# Altium PCB PCB.PcbDoc (part 1 of 2)
Units mm, origin at the board's own origin, x right, y up, seen from the top; angles counter-clockwise.
Board outline 100 x 50 mm, 4 copper layers (Top Layer, Vdd, GND, Bottom Layer), stack 0.603 mm thick; 99 components, 96 nets, 382 pads, 148 vias.
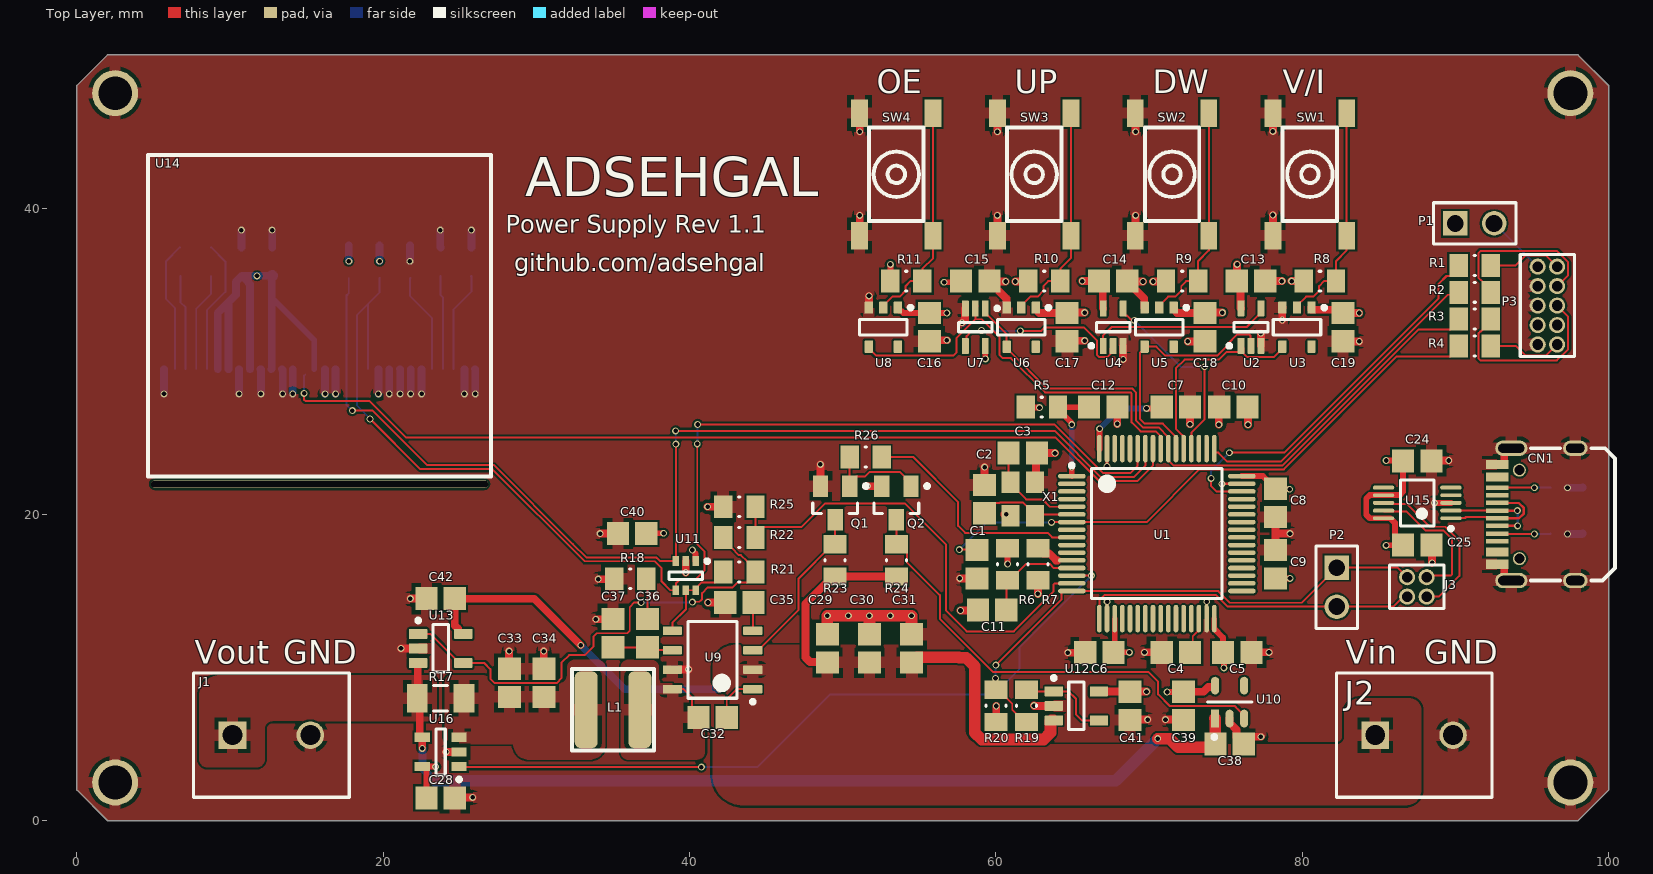
[diagram p0: Top Layer view]
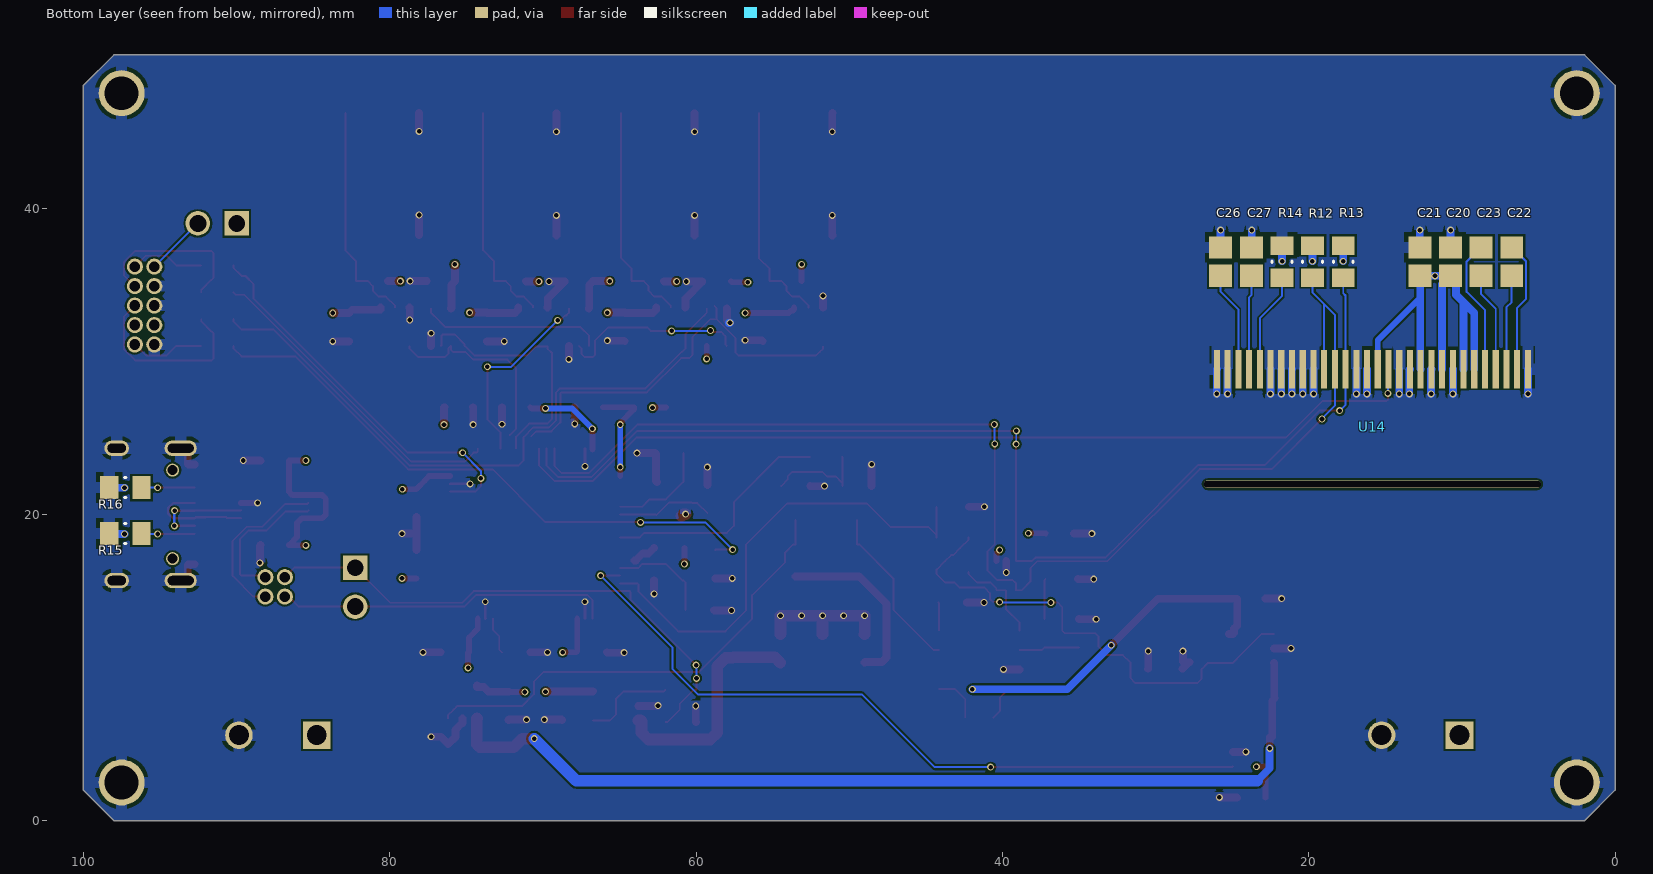
[diagram p1: Bottom Layer view, seen from below]
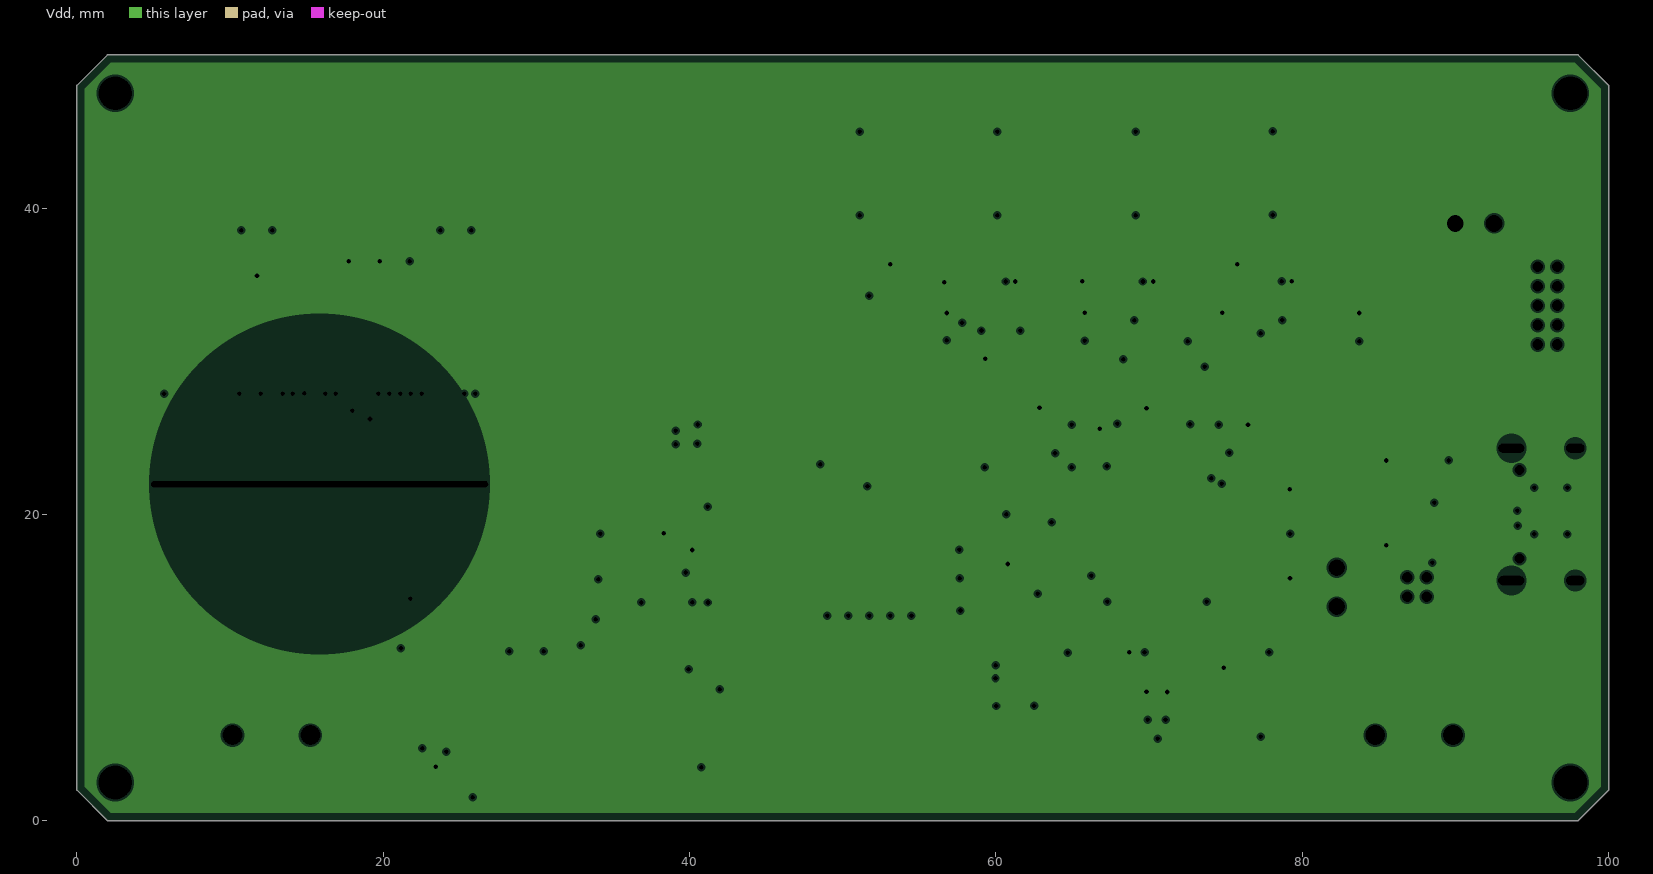
[diagram p2: Vdd, clearances drawn from the general rule]
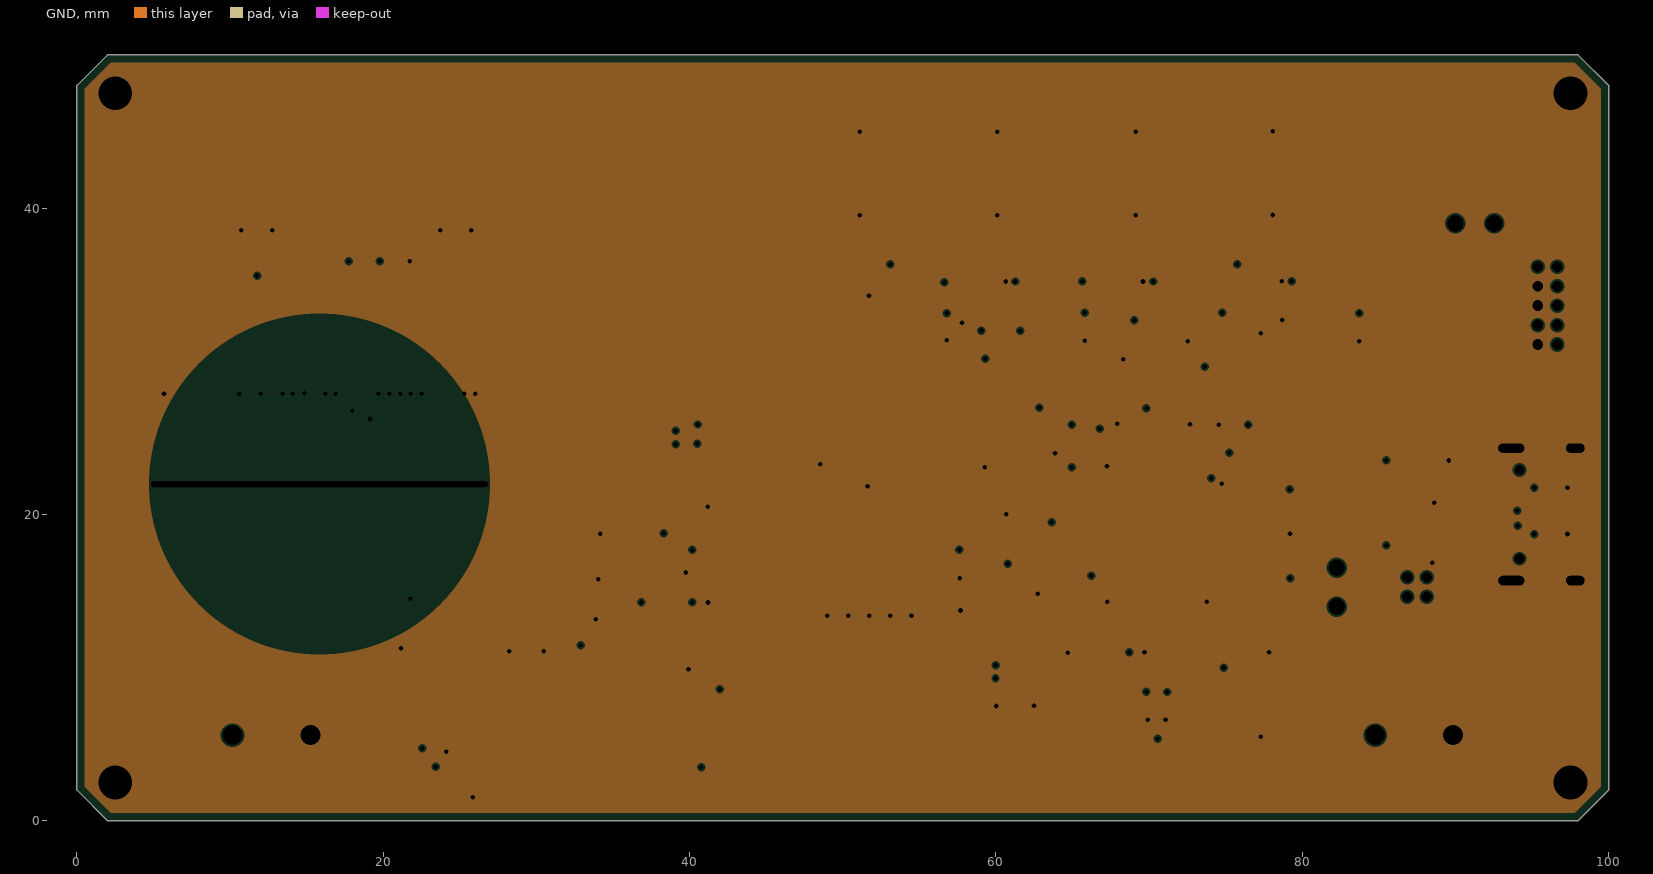
[diagram p3: GND, clearances drawn from the general rule]
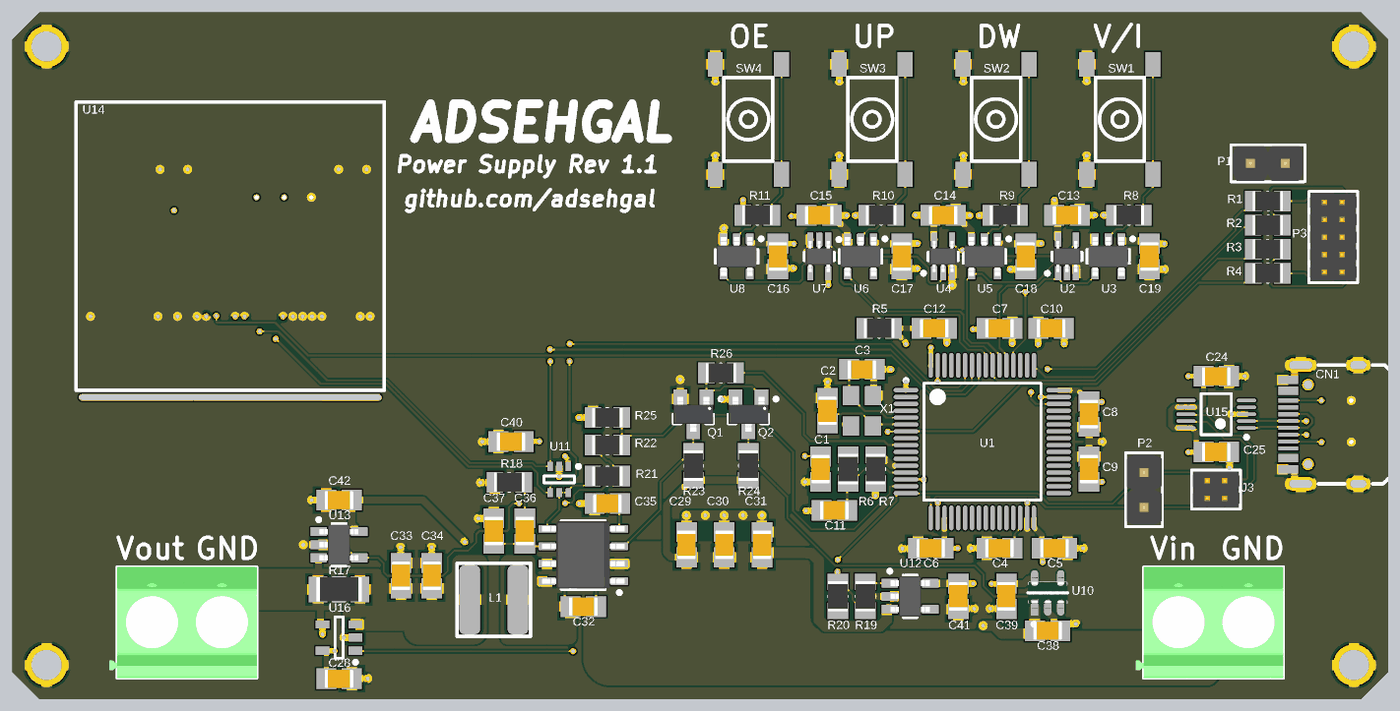
[diagram p4: 3D render of the assembled board from above, using the file's embedded part models]
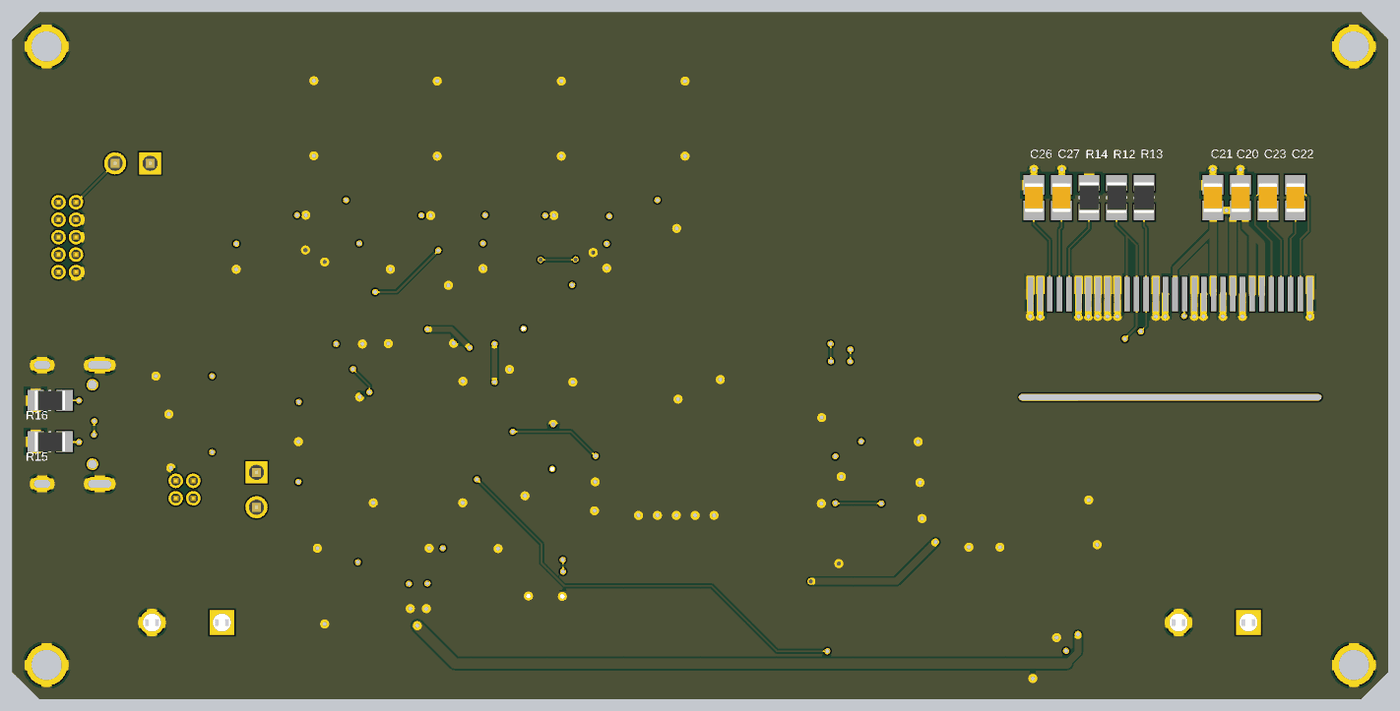
[diagram p5: 3D render of the assembled board from below, using the file's embedded part models]

## Layer stack, top to bottom
Top Solder: solder mask 0.0102, Solder Resist, Dk 3.5
Top Layer: signal copper 0.0356
Dielectric 2: prepreg 0.0711, PP-006, Dk 4.1
Vdd: plane copper 0.035, net +3v3
Dielectric 1: dielectric 0.32, FR-4, Dk 4.8
GND: plane copper 0.035, net GND
Dielectric 3: prepreg 0.0711, PP-006, Dk 4.1
Bottom Layer: signal copper 0.0356
Bottom Solder: solder mask 0.0102, Solder Resist, Dk 3.5

## Board outline
100,2 98,0 2,0 0,2 0,48 2,50 98,50 100,48

## Design rules (kind name [scope] priority, off if disabled: settings)
Clearance [All] p1: gap=0.127 ignorepadtopadclearanceinfootprint=FALSE except(0: Arc-Hole Track-Hole SMDPad-Hole THPad-Hole Via-Hole Fill-Hole Poly-Hole Region-Hole Text-Hole)
DiffPairsRouting [All] p1: maxlimit=0.254 minlimit=0.178 mostfreqgap=0.178 toplayer_minwidth=0.127 toplayer_maxwidth=0.381 toplayer_prefwidth=0.152 bottomlayer_minwidth=0.127 bottomlayer_maxwidth=0.381 bottomlayer_prefwidth=0.152 maxuncoupledlength=12.7
PlaneClearance [All] p1: clearance=0.127
PlaneConnect [All] p1: planeconnectstyle=Relief reliefexpansion=0.254 reliefentries=4 reliefconductorwidth=0.254 reliefairgap=0.254
PolygonConnect [All] p1: connectstyle=Relief reliefconductorwidth=0.762 reliefentries=4 polygonreliefangle="90 Angle" airgapwidth=0.254
RoutingVias [All] p1: holewidth=0.3 width=0.45 viastyle="Through Hole" minholewidth=0.3 minwidth=0.45 maxholewidth=0.3 maxwidth=0.45
SolderMaskExpansion [All] p1: expansion=0.102 istentingtop=FALSE
Width Power_3v3 [(InNet('+3v3') OR InNet('Vbat'))] p1: maxlimit=0.762 minlimit=0.178 preferedwidth=0.508
Width Power_AGND [InNet('AGND')] p2: maxlimit=0.762 minlimit=0.381 preferedwidth=0.508
Width Power_DGND [InNet('GND')] p3: maxlimit=0.762 minlimit=0.178 preferedwidth=0.508
Width Power_Vout [InNet('VCC')] p4: maxlimit=0.762 minlimit=0.381 preferedwidth=0.508
Width Power_Vin [InNet('+12')] p5: maxlimit=0.762 minlimit=0.381 preferedwidth=0.508
Width Width_5mil [All] p6: maxlimit=0.152 minlimit=0.127 preferedwidth=0.127
Width Width_0.254mm [All] p7 off: maxlimit=0.254 minlimit=0.254 preferedwidth=0.254
27 further rules are at their usual default settings.

## Classes and differential pairs
net class N000-3_[0..15]: N000-3_0 N000-3_1 N000-3_2 N000-3_3 N000-3_4 N000-3_5 N000-3_6 N000-3_7 N000-3_8 N000-3_9 N000-3_10 N000-3_11 N000-3_12 N000-3_13 N000-3_14 N000-3_15
net class N000-2_[0..15]: N000-2_0 N000-2_1 N000-2_2 N000-2_3 N000-2_4 N000-2_5 N000-2_6 N000-2_7 N000-2_8 N000-2_9 N000-2_10 N000-2_11 N000-2_12 N000-2_13 N000-2_14 N000-2_15
net class N000-1_[0..15]: N000-1_0 N000-1_1 N000-1_2 N000-1_3 N000-1_4 N000-1_5 N000-1_6 N000-1_7 N000-1_8 N000-1_9 N000-1_10 N000-1_11 N000-1_12 N000-1_13 N000-1_14 N000-1_15
component class UI: C13 C14 C15 C16 C17 C18 C19 C20 C21 C22 C23 C24 C25 C26 C27 CN1 J3 R8 R9 R10 R11 R12 R13 R14 R15 R16 SW1 SW2 SW3 SW4 U2 U3 U4 U5 U6 U7 U8 U15
component class Power: C28 C29 C30 C31 C32 C33 C34 C35 C36 C37 C38 C39 C40 C41 C42 J1 J2 L1 Q1 Q2 R17 R18 R19 R20 R21 R22 R23 R24 R25 R26 U9 U10 U11 U12 U13 U16
component class MCU: C1 C2 C3 C4 C5 C6 C7 C8 C9 C10 C11 C12 P1 P2 P3 R1 R2 R3 R4 R5 R6 R7 U1 X1
differential pair D: +D_P -D_N

## Components (designator, comment, footprint, x,y, rotation, side; value= is the part's Value field where it differs from the comment)
C1 "Capacitor 100 nF +/-10% 50 V 0805" CAPC2013X95X50ML10T25 58.75,16.75 r270 top value=100nF
C2 "Capacitor 100 nF +/-10% 50 V 0805" CAPC2013X95X50ML10T25 59.25,21 r270 top value=100nF
C3 "Capacitor 100 nF +/-10% 50 V 0805" CAPC2013X95X50ML10T25 61.75,24 r180 top value=100nF
C4 "Capacitor 100 nF +/-10% 50 V 0805" CAPC2013X95X50ML10T25 71.75,11 r180 top value=100nF
C5 "Capacitor 100 nF +/-10% 50 V 0805" CAPC2013X95X50ML10T25 75.75,11 r180 top value=100nF
C6 "Capacitor 100 nF +/-10% 50 V 0805" CAPC2013X95X50ML10T25 66.75,11 r0 top value=100nF
C7 "Capacitor 100 nF +/-10% 50 V 0805" CAPC2013X95X50ML10T25 71.75,27 r180 top value=100nF
C8 "Capacitor 100 nF +/-10% 50 V 0805" CAPC2013X95X50ML10T25 78.25,20.75 r90 top value=100nF
C9 "Capacitor 100 nF +/-10% 50 V 0805" CAPC2013X95X50ML10T25 78.25,16.75 r270 top value=100nF
C10 "Capacitor 100 nF +/-10% 50 V 0805" CAPC2013X95X50ML10T25 75.5,27 r0 top value=100nF
C11 "Capacitor 100 nF +/-10% 50 V 0805" CAPC2013X95X50ML10T25 59.75,13.75 r0 top value=100nF
C12 "Capacitor 100 nF +/-10% 50 V 0805" CAPC2013X95X50ML10T25 67,27 r180 top value=100nF
C13 "Capacitor 100 nF +/-10% 50 V 0805" CAPC2013X95X50ML10T25 76.65,35.225 r0 top value=100nF
C14 "Capacitor 100 nF +/-10% 50 V 0805" CAPC2013X95X50ML10T25 67.65,35.225 r0 top value=100nF
C15 "Capacitor 100 nF +/-10% 50 V 0805" CAPC2013X95X50ML10T25 58.65,35.225 r0 top value=100nF
C16 "Capacitor 100 nF +/-10% 50 V 0805" CAPC2013X95X50ML10T25 55.65,32.225 r270 top value=100nF
C17 "Capacitor 100 nF +/-10% 50 V 0805" CAPC2013X95X50ML10T25 64.65,32.225 r270 top value=100nF
C18 "Capacitor 100 nF +/-10% 50 V 0805" CAPC2013X95X50ML10T25 73.65,32.225 r270 top value=100nF
C19 "Capacitor 100 nF +/-10% 50 V 0805" CAPC2013X95X50ML10T25 82.65,32.225 r270 top value=100nF
C20 "Capacitor 100 nF +/-10% 50 V 0805" CAPC2013X95X50ML10T25 10.75,36.5 r90 bottom value=1uF
C21 "Capacitor 100 nF +/-10% 50 V 0805" CAPC2013X95X50ML10T25 12.75,36.5 r270 bottom value=1uF
C22 "Capacitor 100 nF +/-10% 50 V 0805" CAPC2013X95X50ML10T25 6.75,36.5 r270 bottom value=1uF
C23 "Capacitor 100 nF +/-10% 50 V 0805" CAPC2013X95X50ML10T25 8.75,36.5 r90 bottom value=1uF
C24 "Capacitor 100 nF +/-10% 50 V 0805" CAPC2013X95X50ML10T25 87.5,23.5 r0 top value=100nF
C25 "Capacitor 100 nF +/-10% 50 V 0805" CAPC2013X95X50ML10T25 87.5,18 r0 top value=100nF
C26 "Capacitor 100 nF +/-10% 50 V 0805" CAPC2013X95X50ML10T25 25.75,36.5 r270 bottom value=2.2uF
C27 "Capacitor 100 nF +/-10% 50 V 0805" CAPC2013X95X50ML10T25 23.75,36.5 r270 bottom value=4.7uF
C28 "Capacitor 100 nF +/-10% 50 V 0805" CAPC2013X95X50ML10T25 23.75,1.5 r0 top value=100nF
C29 "Capacitor 100 nF +/-10% 50 V 0805" CAPC2013X95X50ML10T25 49,11.25 r90 top value=100nF
C30 "Capacitor 100 nF +/-10% 50 V 0805" CAPC2013X95X50ML10T25 51.75,11.25 r90 top value=100nF
C31 "Capacitor 100 nF +/-10% 50 V 0805" CAPC2013X95X50ML10T25 54.5,11.25 r90 top value=100nF
C32 "Capacitor 100 nF +/-10% 50 V 0805" CAPC2013X95X50ML10T25 41.5,6.75 r180 top value=100nF
C33 "Capacitor 100 nF +/-10% 50 V 0805" CAPC2013X95X50ML10T25 28.25,9 r270 top value=100nF
C34 "Capacitor 100 nF +/-10% 50 V 0805" CAPC2013X95X50ML10T25 30.5,9 r270 top value=100nF
C35 "Capacitor 100 nF +/-10% 50 V 0805" CAPC2013X95X50ML10T25 43.25,14.25 r180 top value=100nF
C36 "Capacitor 100 nF +/-10% 50 V 0805" CAPC2013X95X50ML10T25 37.25,12.25 r90 top value=100nF
C37 "Capacitor 100 nF +/-10% 50 V 0805" CAPC2013X95X50ML10T25 35,12.25 r90 top value=100nF
C38 "Capacitor 100 nF +/-10% 50 V 0805" CAPC2013X95X50ML10T25 75.25,5 r180 top value=100nF
C39 "Capacitor 100 nF +/-10% 50 V 0805" CAPC2013X95X50ML10T25 72.25,7.5 r90 top value=100nF
C40 "Capacitor 100 nF +/-10% 50 V 0805" CAPC2013X95X50ML10T25 36.25,18.75 r180 top value=100nF
C41 "Capacitor 100 nF +/-10% 50 V 0805" CAPC2013X95X50ML10T25 68.75,7.5 r270 top value=100nF
C42 "Capacitor 100 nF +/-10% 50 V 0805" CAPC2013X95X50ML10T25 23.75,14.5 r180 top value=100nF
CN1 "USB C 16 Pin SMD" "USB C 16 Pin SMD-Footprint-1" 92,20 r90 top locked
J1 "1729128" PHOE-1729128-2_V 12.7,5.588 r0 top locked
J2 "1729128" PHOE-1729128-2_V 87.3,5.588 r0 top locked
J3 "62200421121" 62200421121 87.478,15.265 r270 top
L1 "LQH5BPN4R7NT0L" LQH5BPN4R7NT0L-Footprint-1 35,7.25 r180 top
P1 "61300211121" 61300211121 91.25,39 r0 top
P2 "61300211121" 61300211121 82.25,15.25 r270 top
P3 "62201021121" 62201021121 96,33.631 r270 top
Q1 "FDN335N" FAIR-SSOT3L-3_V 49.5,20.75 r270 top
Q2 "FDN335N" FAIR-SSOT3L-3_V 53.5,20.75 r270 top
R1 "Resistor 0R +/- 1% 0805 125 mW" RESC2013X50X35ML15T15 91.25,36.25 r180 top value=0
R2 "Resistor 0R +/- 1% 0805 125 mW" RESC2013X50X35ML15T15 91.25,34.5 r180 top value=0
R3 "Resistor 0R +/- 1% 0805 125 mW" RESC2013X50X35ML15T15 91.25,32.75 r180 top value=0
R4 "Resistor 0R +/- 1% 0805 125 mW" RESC2013X50X35ML15T15 91.25,31 r180 top value=0
R5 "Resistor 0R +/- 1% 0805 125 mW" RESC2013X50X35ML15T15 63,27 r0 top value=0
R6 "Resistor 0R +/- 1% 0805 125 mW" RESC2013X50X35ML15T15 60.75,16.75 r270 top value=0
R7 "Resistor 0R +/- 1% 0805 125 mW" RESC2013X50X35ML15T15 62.75,16.75 r270 top value=0
R8 "Resistor 0R +/- 1% 0805 125 mW" RESC2013X50X35ML15T15 81.15,35.225 r180 top value=1K
R9 "Resistor 0R +/- 1% 0805 125 mW" RESC2013X50X35ML15T15 72.15,35.225 r180 top value=1K
R10 "Resistor 0R +/- 1% 0805 125 mW" RESC2013X50X35ML15T15 63.15,35.225 r180 top value=1K
R11 "Resistor 0R +/- 1% 0805 125 mW" RESC2013X50X35ML15T15 54.15,35.225 r180 top value=1K
R12 "Resistor 0R +/- 1% 0805 125 mW" RESC2013X50X35ML15T15 19.75,36.5 r90 bottom value=4.7K
R13 "Resistor 0R +/- 1% 0805 125 mW" RESC2013X50X35ML15T15 17.75,36.5 r90 bottom value=4.7K
R14 "Resistor 0R +/- 1% 0805 125 mW" RESC2013X50X35ML15T15 21.75,36.5 r90 bottom value=390K
R15 "Resistor 0R +/- 1% 0805 125 mW" RESC2013X50X35ML15T15 97.25,18.75 r0 bottom value=5.1K
R16 "Resistor 0R +/- 1% 0805 125 mW" RESC2013X50X35ML15T15 97.25,21.75 r0 bottom value=5.1K
R17 "Resistor 0R +/- 5% 1206 250 mW" RESC3216X60X45ML15T20 23.75,8 r0 top value=0
R18 "Resistor 0R +/- 1% 0805 125 mW" RESC2013X50X35ML15T15 36.125,15.8 r180 top value=0
R19 "Resistor 0R +/- 1% 0805 125 mW" RESC2013X50X35ML15T15 62,7.5 r270 top value=0
R20 "Resistor 0R +/- 1% 0805 125 mW" RESC2013X50X35ML15T15 60,7.5 r90 top value=0
R21 "Resistor 0R +/- 1% 0805 125 mW" RESC2013X50X35ML15T15 43.25,16.25 r180 top value=0
R22 "Resistor 0R +/- 1% 0805 125 mW" RESC2013X50X35ML15T15 43.25,18.5 r0 top value=0
R23 "Resistor 0R +/- 1% 0805 125 mW" RESC2013X50X35ML15T15 49.5,17 r270 top value=0
R24 "Resistor 0R +/- 1% 0805 125 mW" RESC2013X50X35ML15T15 53.5,17 r270 top value=0
R25 "Resistor 0R +/- 1% 0805 125 mW" RESC2013X50X35ML15T15 43.25,20.5 r0 top value=0
R26 "Resistor 0R +/- 1% 0805 125 mW" RESC2013X50X35ML15T15 51.5,23.75 r180 top value=0
SW1 "K2-1187SQ-A4SW" K2-1187SQ-A4SW-Footprint-1 80.495,42.201 r90 top
SW2 "K2-1187SQ-A4SW" K2-1187SQ-A4SW-Footprint-1 71.495,42.201 r90 top
SW3 "K2-1187SQ-A4SW" K2-1187SQ-A4SW-Footprint-1 62.495,42.201 r90 top
SW4 "K2-1187SQ-A4SW" K2-1187SQ-A4SW-Footprint-1 53.495,42.201 r90 top
U1 "STM32F401RBT6" STM-LQFP64_N 70.5,18.75 r0 top locked
U2 "SN74LVC1G08DCKR" DCK0005A_M 76.65,32.225 r90 top
U3 "SN74LVC1G17DBVR" DBV0005A_L 79.65,32.225 r270 top
U4 "SN74LVC1G08DCKR" DCK0005A_M 67.65,32.225 r90 top
U5 "SN74LVC1G17DBVR" DBV0005A_L 70.65,32.225 r270 top
U6 "SN74LVC1G17DBVR" DBV0005A_L 61.65,32.225 r270 top
U7 "SN74LVC1G08DCKR" DCK0005A_M 58.65,32.225 r270 top
U8 "SN74LVC1G17DBVR" DBV0005A_L 52.65,32.225 r270 top
U9 "TPS54331DR" D0008A_L 41.5,10.5 r180 top
U10 "MIC5205-3.3YM5-TR" FP-M5-IPC_C 75.25,7.75 r90 top
U11 "MCP4018T-502E/LT" SC70-LT6_L 39.75,16 r270 top
U12 "TLV2711CDBVR" DBV0005A_M 65.25,7.5 r0 top
U13 "TLV2711CDBVR" DBV0005A_M 23.75,11.25 r0 top
U14 "SSD1306_0.96in" SSD1306_0.96in-Footprint-1 15.845,32.976 r0 top locked
U15 "CH340E" TSSOP50P490X110-10N 87.5,20.75 r180 top
U16 "INA180A3" SOT95P245X110-5N 23.75,4.5 r180 top
X1 "Crystal_3225_1_3" Crystal_3225_1_3-Footprint-1 61.75,21 r270 top

## Footprints (in the part's own frame and the unit in brackets; to place one, negate y for a bottom-side part, rotate by r counter-clockwise, add the part's x,y. Pads: shape width x height; smd on the part's side, far side on the other; paste and mask are expansions set on the pad)
61300211121 [mm] "Pin Header, pitch 2.54 mm, THT, Vertical, single row, 2p"
  rect 1.6x1.6 hole 1.1: 1(-1.27,0)
  round 1.6 hole 1.1: 2(1.27,0)
  silkscreen extent -2.69,-1.35 2.69,1.35, body extent -2.54,-1.27 2.54,1.27, height 8.57
62200421121 [mm] "Pin Header, pitch 1.27 mm, THT, Vertical, dual row, 4p"
  round 1.05 hole 0.7: 1(-0.635,-0.635) 2(-0.635,0.635) 3(0.635,-0.635) 4(0.635,0.635)
  silkscreen extent -1.42,-1.78 1.42,1.78, body extent -1.27,-1.7 1.27,1.7, height 5.33
62201021121 [mm] "Pin Header, pitch 1.27 mm, THT, Vertical, dual row, 10p"
  round 1.05 hole 0.7: 1(-2.54,-0.635) 2(-2.54,0.635) 3(-1.27,-0.635) 4(-1.27,0.635) 5(0,-0.635) 6(0,0.635) 7(1.27,-0.635) 8(1.27,0.635) 9(2.54,-0.635) 10(2.54,0.635)
  silkscreen extent -3.32,-1.78 3.32,1.78, body extent -3.17,-1.7 3.18,1.7, height 5.33
CAPC2013X95X50ML10T25 [mm] "Chip Capacitor, 2-Leads, Body 2.10x1.35mm, IPC Low Density"
  rect 1.45x1.5 smd: 1(-0.925,0) 2(0.925,0)
  body extent -1.05,-0.67 1.05,0.67, height 0.95
Crystal_3225_1_3-Footprint-1 [mm]
  rect 1.4x1.2 smd: 1(-1.1,-0.8) 2(1.1,-0.8) 3(1.1,0.8) 4(-1.1,0.8)
  body extent -1.52,-1.27 1.52,1.27, height 0.7
D0008A_L [mm] "SOIC, 8-Leads, Body 5x4mm, Pitch 1.27mm, IPC High Density"
  rrect18% 1.25x0.55 smd: 1(-2.625,1.905) 2(-2.625,0.635) 3(-2.625,-0.635) 4(-2.625,-1.905) 5(2.625,-1.905) 6(2.625,-0.635) 7(2.625,0.635) 8(2.625,1.905)
  silkscreen extent -2.75,-2.5 1.6,2.85, body extent -3,-2.45 3,2.45, height 1.63
DBV0005A_L [mm] "SOT23, 5-Leads, Body 3.05x1.75mm, Pitch 0.95mm, IPC High Density"
  rrect18% 0.8x0.55 smd: 1(-1.275,0.95) 2(-1.275,0) 3(-1.275,-0.95) 4(1.275,-0.95) 5(1.275,0.95)
  silkscreen extent -1.4,-1.55 0.5,1.9, body extent -1.42,-1.46 1.42,1.46, height 1.08
DBV0005A_M [mm] "SOT23, 5-Leads, Body 3.05x1.75mm, Pitch 0.95mm, IPC Low Density"
  rrect15% 1.2x0.65 smd: 1(-1.475,0.95) 2(-1.475,0) 3(-1.475,-0.95) 4(1.475,-0.95) 5(1.475,0.95)
  silkscreen extent -1.6,-1.55 0.5,1.95, body extent -1.42,-1.46 1.42,1.46, height 1.08
DCK0005A_M [mm] "SOT23, 5-Leads, Body 2.15x1.4mm, Pitch 0.65mm, IPC Low Density"
  rrect22% 1.05x0.45 smd: 1(-1.225,0.65) 2(-1.225,0) 3(-1.225,-0.65) 4(1.225,-0.65) 5(1.225,0.65)
  silkscreen extent -1.35,-1.1 0.3,1.55, body extent -1.14,-1 1.14,1, height 0.94
FAIR-SSOT3L-3_V [mm] "SOT23, 3-Leads, Body 2.92x1.4mm, Pitch 0.95mm"
  rect 1.4x1 smd: 1(-1.1,0.95) 2(-1.1,-0.95) 3(1.1,0)
  silkscreen extent -1.22,-1.46 0.7,2.13, body extent -1.26,-1.46 1.26,1.46, height 1.12
FP-M5-IPC_C [mm]
  rect 1.156x0.53 smd paste+0 mask+0: 1(-1.075,0.95)
  rrect100% 1.156x0.53 smd paste+0 mask+0: 2(-1.075,0) 3(-1.075,-0.95) 4(1.075,-0.95) 5(1.075,0.95)
  silkscreen extent -2.4,-1.45 0,1.45, body extent -1.75,-1.55 1.75,1.55, height 0.25
K2-1187SQ-A4SW-Footprint-1 [mm]
  rect 1.8x1.1 smd: 1(-4,2.4) 2(-4,-2.4) 3(4,2.4) 4(4,-2.4)
  silkscreen extent -3.05,-1.78 3.05,1.78
LQH5BPN4R7NT0L-Footprint-1 [mm]
  rrect50% 1.5x5 smd: 1(-1.75,0) 2(1.75,0)
  silkscreen extent -2.67,-2.67 2.67,2.67, body extent -2.67,-2.67 2.67,2.67, height 2.2
PHOE-1729128-2_V [mm] "Receptacle, 2-Leads, Body 8.1x10.16mm, Pitch 5.08mm"
  rect 1.8x1.8 hole 1.3: 1(-2.54,0)
  round 1.8 hole 1.3: 2(2.54,0)
  silkscreen extent -5.08,-4.05 5.08,4.05, body extent -5.65,-4.05 5.08,4.05, height 10.01
RESC2013X50X35ML15T15 [mm] "Chip Resistor, 2-Leads, Body 2.2x1.4mm, IPC Low Density"
  rect 1.2x1.5 smd: 1(-1.05,0) 2(1.05,0)
  silkscreen extent -0.05,-0.65 0.05,0.65, body extent -1.1,-0.7 1.1,0.7, height 0.5
RESC3216X60X45ML15T20 [mm] "Chip Resistor, 2-Leads, Body 3.3x1.75mm, IPC Low Density"
  rect 1.35x1.85 smd: 1(-1.525,0) 2(1.525,0)
  silkscreen extent -0.45,-0.82 0.45,0.82, body extent -1.65,-0.87 1.65,0.87, height 0.6
SC70-LT6_L [mm] "SOT363, 6-Leads, Body 2x1.3mm, Pitch 0.65mm, Lead Span 2.1mm, IPC High Density"
  rect 0.65x0.4 smd: 1(-0.95,0.65) 2(-0.95,0) 3(-0.95,-0.65) 4(0.95,-0.65) 5(0.95,0) 6(0.95,0.65)
  silkscreen extent -1.07,-1.1 0.25,1.53, body extent -0.7,-1.1 0.7,1.1, height 1.1
SOT95P245X110-5N [mm] "SOT23, 5-Leads, Body 2.90x2.45mm, Pitch 0.95mm, IPC Medium Density"
  rect 1x0.6 smd: 1(-1.2,0.95) 2(-1.2,0) 3(-1.2,-0.95) 4(1.2,-0.95) 5(1.2,0.95)
  silkscreen extent -1.33,-1.5 0.3,1.92, body extent -0.7,-1.5 0.7,1.5, height 1.1
SSD1306_0.96in-Footprint-1 [mm]
  rect 0.4x2.5 smd far side: 1(-10.15,-3.5) 2(-9.45,-3.5) 3(-8.75,-3.5) 4(-8.05,-3.5) 5(-7.35,-3.5) 6(-6.65,-3.5) 7(-5.95,-3.5) 8(-5.25,-3.5) 9(-4.55,-3.5) 10(-3.85,-3.5) 11(-3.15,-3.5) 12(-2.45,-3.5) 13(-1.75,-3.5) 14(-1.05,-3.5) 15(-0.35,-3.5) 16(0.35,-3.5) 17(1.05,-3.5) 18(1.75,-3.5) 19(2.45,-3.5) 20(3.15,-3.5) 21(3.85,-3.5) 22(4.55,-3.5) 23(5.25,-3.5) 24(5.95,-3.5) 25(6.65,-3.5) 26(7.35,-3.5) 27(8.05,-3.5) 28(8.75,-3.5) 29(9.45,-3.5) 30(10.15,-3.5)
  oval 22x0.5 hole 0.4 slot 22 at 0 deg: 31(0,-11)
  silkscreen extent -11.2,-10.49 11.2,10.49
STM-LQFP64_N [mm] "Thin QFP, 64-Leads, Body 10x10mm, Pitch 0.5mm, IPC Medium Density"
  oval 1.8x0.3 smd: 1(-5.55,3.75) 2(-5.55,3.25) 3(-5.55,2.75) 4(-5.55,2.25) 5(-5.55,1.75) 6(-5.55,1.25) 7(-5.55,0.75) 8(-5.55,0.25) 9(-5.55,-0.25) 10(-5.55,-0.75) 11(-5.55,-1.25) 12(-5.55,-1.75) 13(-5.55,-2.25) 14(-5.55,-2.75) 15(-5.55,-3.25) 16(-5.55,-3.75) 33(5.55,-3.75) 34(5.55,-3.25) 35(5.55,-2.75) 36(5.55,-2.25) 37(5.55,-1.75) 38(5.55,-1.25) 39(5.55,-0.75) 40(5.55,-0.25) 41(5.55,0.25) 42(5.55,0.75) 43(5.55,1.25) 44(5.55,1.75) 45(5.55,2.25) 46(5.55,2.75) 47(5.55,3.25) 48(5.55,3.75)
  oval 0.3x1.8 smd: 17(-3.75,-5.55) 18(-3.25,-5.55) 19(-2.75,-5.55) 20(-2.25,-5.55) 21(-1.75,-5.55) 22(-1.25,-5.55) 23(-0.75,-5.55) 24(-0.25,-5.55) 25(0.25,-5.55) 26(0.75,-5.55) 27(1.25,-5.55) 28(1.75,-5.55) 29(2.25,-5.55) 30(2.75,-5.55) 31(3.25,-5.55) 32(3.75,-5.55) 49(3.75,5.55) 50(3.25,5.55) 51(2.75,5.55) 52(2.25,5.55) 53(1.75,5.55) 54(1.25,5.55) 55(0.75,5.55) 56(0.25,5.55) 57(-0.25,5.55) 58(-0.75,5.55) 59(-1.25,5.55) 60(-1.75,5.55) 61(-2.25,5.55) 62(-2.75,5.55) 63(-3.25,5.55) 64(-3.75,5.55)
  silkscreen extent -5.67,-4.25 4.25,4.57, body extent -5,-5 5,5, height 1.6
TSSOP50P490X110-10N [mm] "TSSOP, 10-Leads, Body 2.98x2.98mm, Pitch 0.50mm, IPC Medium Density"
  oval 1.4x0.25 smd: 1(-2.2,1) 2(-2.2,0.5) 3(-2.2,0) 4(-2.2,-0.5) 5(-2.2,-1) 6(2.2,-1) 7(2.2,-0.5) 8(2.2,0) 9(2.2,0.5) 10(2.2,1)
  silkscreen extent -2.33,-1.5 1.1,1.8, body extent -1.5,-1.5 1.5,1.5, height 1.1
"USB C 16 Pin SMD-Footprint-1" [mm]
  rect 0.6x1.45 smd: A1/B12(-3.25,-0.725) A4/B9(-2.45,-0.725) B1/A12(3.25,-0.725) B4/A9(2.45,-0.725)
  rect 0.3x1.45 smd: A5(-1.25,-0.725) A6(-0.25,-0.725) A7(0.25,-0.725) A8(1.25,-0.725) B5(1.75,-0.725) B6(0.75,-0.725) B7(-0.75,-0.725) B8(-1.75,-0.725)
  round 0.85 hole 0.65 unplated: H1(-2.89,-2.17) H2(2.89,-2.17)
  oval 1x2.1 hole 0.6 slot 1.7 at 90 deg: S1(4.32,-1.64) S2(-4.32,-1.64)
  oval 1x1.6 hole 0.6 slot 1.2 at 90 deg: S3(4.32,-5.82) S4(-4.32,-5.82)
  silkscreen extent -4.32,-8.42 4.32,-2.92, body extent -4.32,-8.38 4.32,-0.13, height 3.21

## Part data
C1 C2 C3 C4 C5 C6 C7 C8 C9 C10 C11 C12 C13 C14 C15 C16 C17 C18 C19 C20 C21 C22 C23 C24 C25 C26 C27 C28 C29 C30 C31 C32 C33 C34 C35 C36 C37 C38 C39 C40 C41 C42: library part CMP-001-00018-4, "Chip Capacitor, 100 nF, +/- 10%, 50 V, 0805 (2012 Metric)", Capacitor Type=Ceramic, Case/Package=0805, Max Operating Temperature=125°C, Min Operating Temperature=-55°C, Tolerance=10%, Voltage Rating=50V, Mounting Technology=SM, Pins=2, RoHS Compliant=True
CN1: library part CMP-002-00071-1, "C167321 Jing Extension", ComponentLink1Description=Datasheet, ComponentLink1URL=https://datasheet.lcsc.com/szlcsc/1811101520_Jing-Extension-of-the-Electronic-Co-C167321_C167321.pdf
J1 J2: library part CMP-2000-05815-1, "PCB Terminal Block, 13.5 A, 400 V, 2-Pin THD, RoHS, Bulk", Current Rating=13500mA, Manufacturer="Phoenix Contact", Package Description="2-Pin Through Hole Device, Body 8.1 x 10.16 mm, Pitch 5.08 mm", Package Reference=1729128-2, Package Version=03/2015, Voltage Rating=400V, Datasheet URL=https://datasheet.ciiva.com/16046/1729128-16046181.pdf, Datasheet Version=12/2013, Manufacturer URL=http://www.phoenixcontact.com/, Mounting Technology=ThroughHole, No. of Positions=2, No. of Rows=1, Orientation=Horizontal, Package URL=https://www.phoenixcontact.com/online/portal/pi/pxc/product_detail_page/!ut/p/b1/3VdJjqNKFDxLH8AFycySyWY2ozFsEPOMMQaDOX1XedGL_1Vdm5YXJleknhSKeBkvI6EA8ncAo3AYoDhBQGco6KN7VURTdemj9us_IEKEZo_YHiPAEWEFmDGOHMORkqKYCORBZxgL7ZoaZYcbFFUZ3fqxSY6GOuxydWUuHqz1ynmMFygu583Bob0Ewr6Sd_l-5m-kAueHiB0jpRwZwe58wwtkpxtMYd_LmGcDRU02dRNEyWt6Y2ti5pSyJ_reIkzIulrqApdnbT11V5jnCKbYNCvhEM1MCpPByat_X379-iThf08CI5GfOPqfBeS3BRoBOdD55AKVv0iLwCMq-2BrzXWSGRH7pUGD9uwXQjiph3xL0DKQwdGa0JImiIOmBNOestqgwTHSSs2oOep-78apyXQBvNi8ZLaFjvjWvcaUEBu0MC6Wbe-d6mB0FAebo2lUWinqYaZs5DAYzV0RP9yitUjnGJ0iI9xhZkT42OCQNUJJhkgWINNQLP2JFP6OpMg3JCVg70jqHT0lvKOnhHf0lPuOnnLf0VPuWx6_dxwUIvwk5WMkT0kLL1mh61l2yZVSzG3pYV_bqo-mj6uMKwKwdnnW8Jh5RTOJzMOA5c-eJDaZQw4mTMPH02PvS_ZAqNVjVTo2WyYLkwH_KU1mmmG5kjRhDqPXLwwVHvVOjCM60-fpXvTDfMGW1PVFVS1r4e4yVDk4ZdNbkUHvqPqQSeian4UD39fNKmachqdJ1NJbyk8rXT9mXTvPk3oE5meulKGgiruPJek-4I9hTT6G8ZLOyRSm2RRVbThERQad5OS28hdt4YW4vG0stgYYzsWsK4_7y6DZMjJSCqri1kyiZR5vD7pwIrNR7QwPHTcLTI5qT7eRlpHrdGiupYlqQDJ7zy_CND8fWWBoLRXxk1RVcXiBQwbTD4Xi7KL-FuO94t9xaqweXzH, Packing=Bulk, PartNumber=1729128, Pitch=5.08mm, RoHS=TRUE
J3: library part CMP-1502-00946-1, "THT Vertical Pin Header WR-PHD, Pitch 1.27 mm, Dual Row, 4 pins", Contact Resistance=20mOhm, Manufacturer="Wurth Elektronik", Operating Temperature=-40to105degC, Rated Current=1A, Withstanding Voltage=500VAC, Working Voltage=100VAC, Datasheet URL=https://katalog.we-online.de/em/datasheet/62200421121.pdf, Gender=Male, Manufacturer URL=http://www.we-online.de, Mounting Technology=THT, Orientation=Vertical, Package Reference=62200421121, Packaging=Box, Part Number=62200421121, Pin Number=4, Pitch=1.27mm, Publisher=WurthElektronik, Row Number=Dual
L1: library part CMP-006-00021-2, "4.7uH 2A 58mOhm 5x5mm inductor Murata", Datasheet=https://datasheet.lcsc.com/szlcsc/1912111437_Murata-Electronics-LQH5BPN4R7NT0L_C171792.pdf
P1 P2: library part CMP-1502-01060-1, "THT Vertical Pin Header WR-PHD, Pitch 2.54 mm, Single Row, 2 pins", Contact Resistance=20mOhm, Manufacturer="Wurth Elektronik", Operating Temperature=-40to105degC, Rated Current=3A, Withstanding Voltage=500VAC, Working Voltage=250VAC, Datasheet URL=https://katalog.we-online.de/em/datasheet/6130xx11121.pdf, Gender=Male, Manufacturer URL=http://www.we-online.de, Mounting Technology=THT, Orientation=Vertical, Package Reference=61300211121, Packaging=Bag, Part Number=61300211121, Pin Number=2, Pitch=2.54mm, Publisher=WurthElektronik, Row Number=Single
P3: library part CMP-1502-00948-1, "THT Vertical Pin Header WR-PHD, Pitch 1.27 mm, Dual Row, 10 pins", Contact Resistance=20mOhm, Manufacturer="Wurth Elektronik", Operating Temperature=-40to105degC, Rated Current=1A, Withstanding Voltage=500VAC, Working Voltage=100VAC, Datasheet URL=https://katalog.we-online.de/em/datasheet/62201021121.pdf, Gender=Male, Manufacturer URL=http://www.we-online.de, Mounting Technology=THT, Orientation=Vertical, Package Reference=62201021121, Packaging=Box, Part Number=62201021121, Pin Number=10, Pitch=1.27mm, Publisher=WurthElektronik, Row Number=Dual
Q1 Q2: library part CMP-2000-06249-1, "N-Channel Specified PowerTrench(R) MOSFET, 2.5 V, 1.7 A, -55 to 150 degC, 3-Pin SSOT3L, RoHS, Tape and Reel", Manufacturer=FairchildSemiconductor, Maximum Continuous Drain Current=1.7A, Maximum Drain Source Voltage=20V, Maximum Gate Source Voltage=±8V, Operating Temperature=-55to150°C, Package=3SuperSOT, Package Description="3-Pin Small Outline Transistor, Body 2.92 x 1.4 mm, Pitch 0.95 mm", Package Reference=SSOT3L, Package Version="Rev. 3, 05/2015", Category=MOSFET, Channel Mode=Enhancement, Channel Type=N, Datasheet URL=https://www.fairchildsemi.com/datasheets/FD/FDN335N.pdf, Datasheet Version="Rev. C, 04/1999", Manufacturer URL=https://www.fairchildsemi.com/, Mounting=SurfaceMount, Mounting Technology=SurfaceMount, Package URL=https://www.fairchildsemi.com/package-drawings/MA/MA03B.pdf, Packaging=Tape&Reel, Rad Hard=No, RDS-on=0.07@4.5VOhm, Typical Fall Time=3ns, Typical Rise Time=8.5ns, Typical Turn-Off Delay Time=11ns, Typical Turn-On Delay Time=5ns
R1 R2 R3 R4 R5 R6 R7 R8 R9 R10 R11 R12 R13 R14 R15 R16 R18 R19 R20 R21 R22 R23 R24 R25 R26: library part CMP-009-00001-4, "Chip Resistor, 0 Ohm, +/- 1%, 125 mW, -55 to 155 degC, 0805 (2012 Metric)", Case/Package=0805, Max Operating Temperature=155°C, Min Operating Temperature=-55°C, Power=125mW, Tolerance=1%, Voltage Rating=150V, Mounting Technology=SM, Pins=2, RoHS Compliant=True
R17: library part CMP-009-00002-4, "Chip Resistor, 0 Ohm, +/- 5%, 0.25 W, -55 to 155 degC, 1206 (3216 Metric)", Case/Package=1206, Max Operating Temperature=155°C, Min Operating Temperature=-55°C, Power=250mW, Tolerance=5%, Voltage Rating=200V, Mounting Technology=SM, Pins=2, RoHS Compliant=True
SW1 SW2 SW3 SW4: library part CMP-011-00013-1, "4 pin SMD switch"
U1: library part CMP-0243-00094-2, "ARM Cortex-M4 32-bit MCU+FPU, 105 DMIPS, 128 kB Flash, 64 kB Internal RAM, 48 I/Os, 64-pin LQFP, -40 to 85 degC, Tray", I/Os (High Current)=48, Manufacturer=STMicroelectronics, Operating Frequency(F) (Processor speed) (MHz)=84, Supply Voltage(Vcc) max (V)=3.6, Supply Voltage(Vcc) min (V)=1.8, ComponentLink1Description="Manufacturer URL", ComponentLink1URL=http://www.st.com/web/en/home.html, ComponentLink2Description=Datasheet, ComponentLink2URL=http://www.st.com/st-web-ui/static/active/en/resource/technical/document/data_brief/DM00071938.pdf, ComponentLink3Description="Package Specification", ComponentLink3URL=http://www.st.com/st-web-ui/static/active/en/resource/technical/document/datasheet/DM00037051.pdf, Core="ARM Cortex-M4", DatasheetVersion="Rev. 1", FLASH Size (Prog) (kB)=128, Internal RAM Size (kB)=64, Mounting Technology="Surface Mount", PackageDescription="64-Pin Low Profile Quad Flat Package, 10 x 10 mm Body, 0.5 mm Pitch", PackageReference=LQFP64, PackageVersion="Rev. 4, 06/2013", Packing=Tray, PartNumber=STM32F401RBT6
U2 U4 U7: library part CMP-0859-00266-3, "Single 2-Input Positive-AND Gate, DCK0005A, LARGE T&R", F @ Nom Voltage(Max)(Mhz)=150, Generic Part Number=SN74LVC1G08, ICC @ Nom Voltage(Max)(mA)=0.01, Manufacturer="Texas Instruments", Operating Temperature Range(C)="-40 to 125,-40 to 85", Rating=Catalog, tpd @ Nom Voltage(Max)(ns)=4.5,6,4,5, Voltage(Nom)(V)=1.8,2.5,3.3,5, 3-State Output=No, Bits(#)=1, DatasheetVersion=SCES217Y, Gate Type=AND, Input Type=CMOS/TTL, Logic=True, Output Drive (IOL/IOH)(Max)(mA)=32/-32, Output Type=CMOS, PackageReference=DCK0005A, Schmitt Trigger=No, Sub-Family="AND Gate", Technology Family=LVC, VCC(Max)(V)=5.5, VCC(Min)(V)=1.65
U3 U5 U6 U8: library part CMP-0859-00033-4, "Single Schmitt-Trigger Buffer, DBV0005A, LARGE T&R", F @ Nom Voltage(Max)(Mhz)=150, Generic Part Number=SN74LVC1G17, ICC @ Nom Voltage(Max)(mA)=0.01, Manufacturer="Texas Instruments", Operating Temperature Range(C)="-40 to 125,-40 to 85", Rating=Catalog, tpd @ Nom Voltage(Max)(ns)=11,6.5,5.5,5, Voltage(Nom)(V)=1.8,2.5,3.3,5, 3-State Output=No, Bits(#)=1, DatasheetVersion=SCES351V, Input Type=CMOS/TTL, Logic=True, Output Drive (IOL/IOH)(Max)(mA)=32/-32, Output Type=CMOS, PackageReference=DBV0005A, Schmitt Trigger=Yes, Sub-Family="Non-Inverting Buffer/Driver", Technology Family=LVC, VCC(Max)(V)=5.5, VCC(Min)(V)=1.65
U9: library part CMP-0323-00209-3, "Buck Step Down Regulator with 3.5 to 28 V Input and 0.8 to 25 V Output, -40 to 150 degC, 8-Pin SOIC (D), Green (RoHS & no Sb/Br)", Manufacturer="Texas Instruments", Rating=Catalog, Switch Current Limit(Typ)(A)=3.5, Code_JEDEC=MS-012AA, ComponentLink1Description=Datasheet, ComponentLink1URL=http://www.ti.com/general/docs/lit/getliterature.tsp?genericPartNumber=TPS54331&fileType=pdf, ComponentLink2Description="Package Specification", ComponentLink2URL=http://www.ti.com/litv/pdf/msoi002j, ComponentLink3Description="URL Link1", ComponentLink3URL="Samples URL:http://www.ti.com/product/tps54331#samples", DatasheetVersion=SLVS839D, Duty Cycle(Max)(%)=90, Eco-Plan="Green (RoHS & no Sb/Br)", Iout(Max)(A)=3, Iq(Typ)(mA)=0.11, Mounting Technology="Surface Mount", PackageDescription="8-Pin Plastic Small Outline Integrated Circuit, 4.9 x 3.9 mm, Pitch 1.27 mm Pitch", PackageReference=D0008A, PackageVersion="revM, Jun-2011", PartNumber=TPS54331DR, Regulated Outputs(#)=1, SubFamily="Step-Down Regulator", Topology=Buck, Vin(Max)(V)=28, Vin(Min)(V)=3.5, Vout(Max)(V)=25, Vout(Min)(V)=0.8
U10: library part CMP-06324-000014-1, "IC REG LINEAR 3.3V 150MA SOT23-5", Dropout Voltage=165mV, Manufacturer=Microchip, Max Junction Temp=+125°C, Max Supply Voltage=16V, Min Supply Voltage=2.5V, Output Current=150mA, Package=M5, Temperature="-40°C to +125°C", Temperature Range Low=-40°C, Accuracy Percentage=2%, Automotive=No, ComponentLink2Description=Datasheet, ComponentLink2URL=http://ww1.microchip.com/downloads/en/DeviceDoc/20005785A.pdf, Device Class L1="Integrated Circuits (ICs)", Device Class L2="Power Management ICs", Device Class L3="Voltage Regulators - Linear", Digikey Description="IC REG LINEAR 3.3V 150MA SOT23-5", Height=1.45mm, Ipc Land Pattern Name=SOT95P280X118-5, Lead Free=Yes, Manufacturer Part Number=MIC5205-3.3YM5-TR, Mouser Description="LDO Voltage Regulators", Number Of Outputs=1, Octopart=https://octopart.com/mic5205-3.3ym5-tr-microchip-66802130, Output Type=Fixed, RoHS=TRUE, Standoff Height=0mm, Temperature Range High=+125°C
U11: library part CMP-0188-00771-2, "7-Bit Single I2C Digital POT with Volatile Memory, 6-pin SC70, Extended Temperature, Tape and Reel", ComponentLink1Description="Manufacturer URL", ComponentLink1URL=http://www.microchip.com/, ComponentLink2Description=Datasheet, ComponentLink2URL=http://ww1.microchip.com/downloads/en/DeviceDoc/22147a.pdf, ComponentLink3Description="Package Specification", ComponentLink3URL=http://www.microchip.com/stellent/groups/techpub_sg/documents/packagingspec/en012702.pdf, DatasheetVersion="revA, Mar-2009", PackageDescription="6-Lead Plastic Small Outline Transistor (LT) [SC70]", PackageReference=SC70-LT6, PackageVersion="revBB, Aug-2009", RevisionNote="URLs added."
U12 U13: library part CMP-0272-00883-3, "Single LinCMOS(TM) Rail-to-Rail uPower Operational Amplifier, 2.7 to 10 V, 0 to 70 degC, 5-pin SOT23 (DBV5), Green (RoHS & no Sb/Br)", Manufacturer="Texas Instruments", Total Supply Voltage(Max)(+5V is 5, +/-5V is 10)=10, Total Supply Voltage(Min)(+5V is 5, +/-5V is 10)=2.7, CMRR(Min)(dB)=65, Code_JEDEC=MO-178, ComponentLink1Description="Manufacturer URL", ComponentLink1URL=http://www.ti.com/, ComponentLink2Description=Datasheet, ComponentLink2URL=http://www.ti.com/general/docs/lit/getliterature.tsp?genericPartNumber=TLV2711&fileType=pdf, ComponentLink3Description="Package Specification", ComponentLink3URL=http://www.ti.com/litv/pdf/mpds018i, DatasheetVersion=SLOS196A, Eco-Plan="Green (RoHS & no Sb/Br)", IIB(Max)(pA)=60, Iq per channel(Max)(mA)=0.025, Mounting Technology="Surface Mount", Number of Channels=1, Offset Drift(Typ)(uV/C)=1, PackageDescription="5-Pin Plastic Small Outline, Body 1.6 x 2.9 mm, Pitch 0.95 mm", PackageReference=DBV0005A, PackageVersion="4073253-4/K, 03/2006", PartNumber=TLV2711CDBVR, Slew Rate(Typ)(V/us)=0.025, Sub Family="Low Power Amp (<=500uA), Low Supply Voltage Amplifier (<=2.7V), Precision Amplifier", Vio (25C)(Max)(mV)=3, Vn at 1kHz(Typ)(nV/rtHz)=22
U14: library part CMP-001-0003-2, "C91755"
U15: library part CMP-015-00008-1, "USB to UART Converter", Datasheet=https://www.mpja.com/download/35227cpdata.pdf
U16: library part CMP-014-00002-1, "Current Sense Amplifier 100V/V", ComponentLink1Description=Datasheet, ComponentLink1URL=https://datasheet.lcsc.com/szlcsc/1811151640_Texas-Instruments-INA180A3IDBVR_C122882.pdf
X1: library part CMP-003-00030-1, "3225 crystal"

## Free pads (board coordinates)
  round 3 hole 2.2: 2(2.5,2.5) 2(2.5,47.5) 2(97.5,2.5) 2(97.5,47.5)

## Via types
v1: diameter 0.45, hole 0.3, Top Layer to Bottom Layer, 148 vias

## Nets (pads, with @x,y where several pads share a name; then routed paths per layer and width w, separated by ;. In a path a pad name is that pad's centre, name@x,y a point inside that pad or via, vN(x,y) a via of type N, cw(c..) or ccw(c..) an arc to the next point about the centre after c; other vN are vias at no path point)
+3v3: C5.2 C6.2 C7.2 C8.2 C9.2 C10.2 C13.1 C14.1 C15.1 C16.1 C17.1 C18.1 C19.1 C20.1 C21.2 C24.1 C25.1 C28.1 C39.2 C40.1 C41.1 P1.1 R5.1 R6.1 R8.2 R9.2 R10.2 R11.2 R12.2 R13.2 U1.19 U1.32 U1.48 U1.64 U2.5 U3.1 U4.5 U5.1 U6.1 U7.5 U8.1 U10.5 U11.1 U12.5 U14.6 U14.7 U14.9 U14.11 U14.15 U15.7 U15.10 U16.5 | length 101.8
  Top Layer w0.381: U16.5 22.56,3.54 U16.5@22.725,3.54 ; C28.1 22.825,3.441 U16.5@22.725,3.54 ; v1(23.419,3.531) 23.409,3.54 U16.5@22.725,3.54 ; C40.1 37.196,18.771 v1(38.303,18.771) ; v1(40.183,17.678) 40.183,17.66 40.391,17.452 40.391,16.959 U11.1 ; R11.2 53.111,35.236 v1(53.111,36.322) ; U8.1 53.6,33.375 53.685,33.29 53.81,33.29 53.95,33.15 C16.1 55.653,33.147 v1(56.794,33.147) ; v1(56.617,35.154) 57.654,35.154 C15.1 ; U7.5 59.305,30.995 59.305,30.154 v1(59.309,30.15) ; R6.1 60.757,17.793 v1(60.757,16.764) ; R5.1 61.975,26.975 v1(62.84,26.975) ; U1.64 66.75,24.247 66.764,24.261 v1(66.764,25.59) ; U1.19 67.75,11.075 67.827,10.998 v1(68.707,10.998) ; v1(69.825,26.924) 70.749,26.924 C7.2 ; v1(71.171,8.407) C39.2@72.263,8.407 ; C39.2 72.25,8.42 C39.2@72.263,8.407 ; C39.2@72.288,8.382 C39.2@72.263,8.407 ; U1.32 74.25,12.531 74.825,11.956 C5.2 74.879,10.946 v1(74.879,9.982) ; U1.48 77.425,22.5 77.69,22.234 77.69,22.209 78.225,21.675 C8.2 78.284,21.641 v1(79.172,21.641) ; C9.2 v1(79.197,15.824) ; U15.7@85.29,21.26 84.399,21.26 84.176,21.037 84.176,19.973 84.399,19.75 U15.10 85.744,19.75 86.041,19.454 86.041,18.534 C25.1 86.558,17.983 v1(85.471,17.983) ; U15.7@85.31,21.26 86.352,21.26 86.575,21.483 C24.1 86.555,23.52 v1(85.471,23.52)
  Top Layer w0.508: v1(61.265,35.204) 62.079,35.204 R10.2 ; U6.1 62.6,33.375 62.825,33.15 C17.1 64.672,33.172 v1(65.786,33.172) ; v1(65.634,35.23) 66.72,35.23 C14.1 66.971,34.979 66.971,33.479 U4.5 ; U12.5 66.737,8.438 68.737,8.438 68.742,8.433 v1(69.825,8.433) ; v1(70.256,35.204) 71.079,35.204 R9.2 ; U5.1 71.6,33.375 71.825,33.15 C18.1 73.672,33.172 v1(74.778,33.172) ; C39.2 73.551,8.425 73.863,8.738 74.29,8.738 74.3,8.748 U10.5 ; v1(75.743,36.322) 75.743,35.243 C13.1 75.971,34.979 75.971,33.479 U2.5 ; C10.2 76.454,26.971 v1(76.454,25.857) ; v1(79.299,35.23) 80.095,35.23 R8.2 ; U3.1 80.6,33.375 80.621,33.354 82.446,33.354 C19.1 82.653,33.147 v1(83.718,33.147)
  Bottom Layer w0.381: 12.722,34.141 15.495,31.368 U14.15 ; v1(66.764,25.59) 68.097,26.924 v1(69.825,26.924)
  Bottom Layer w0.508: U14.6 9.195,33.147 9.895,33.847 ; U14.7 9.895,33.847 ; U14.9 11.295,35.03 11.246,35.079 11.246,35.104 C20.1@10.775,35.575 ; U14.11 12.722,29.503 12.722,34.141 C21.2@12.722,35.548 ; C21.2 v1(11.762,35.575) C20.1@10.775,35.575 ; R13.2 17.755,37.545 v1(17.755,36.525) ; R12.2 19.761,37.539 v1(19.761,36.525) ; 9.895,33.847 10.389,34.341 10.389,35.189 C20.1@10.775,35.575
  Bottom Layer w0.762: C21.2@12.722,35.548 C21.2
+12: C29.1 C30.1 C31.1 C42.1 J2.1 R23.2 R24.2 U9.2 U12.3 U13.5 | length 49.3
  Top Layer w0.508: U13.5 24.95,12.2 24.879,12.271 24.879,12.546 24.675,12.75 C42.1 29.848,14.5 v1(32.893,11.455) ; C29.1 48.962,10.363 47.859,10.363 47.561,10.661 47.561,14.161 49.35,15.95 R23.2 R24.2
  Top Layer w0.762: C31.1 54.844,10.669 57.581,10.669 57.607,10.643 58.064,10.643 58.623,10.084 58.623,5.755 59.07,5.309 63.11,5.309 63.556,5.755 63.556,6.494 63.612,6.55 U12.3
  Bottom Layer w0.508: v1(32.893,11.455) 35.763,8.585 v1(41.961,8.585)
AGND: R7.1 U1.12 | length 1.6
  Top Layer w0.508: R7.1 63.096,17.454 63.47,17.454 63.924,17 64.021,17
CH_RX: J3.2 U15.9 | length 9.3
  Top Layer w0.127: U15.9 85.364,20.186 86.814,20.186 88.06,18.941 89.229,18.941 89.764,18.406 89.764,16.074 89.689,16 88.212,16 J3.2
CH_TX: J3.4 U15.8 | length 11
  Top Layer w0.127: U15.8 85.364,20.686 86.828,20.686 88.32,19.195 89.334,19.195 90.25,18.279 90.25,15.988 88.892,14.63 J3.4
D_N: CN1.A7 CN1.B7 U15.2 | length 6.7
  Top Layer w0.152: U15.2 CN1.A7 92.728,20.247 94.031,20.247 v1(94.034,20.244) ; CN1.B7 92.727,19.252 94.055,19.252 v1(94.056,19.253)
  Bottom Layer w0.152: v1(94.034,20.244) 94.056,20.222 v1(94.056,19.253)
D_P: CN1.A6 CN1.B6 U15.1 | length 7.2
  Top Layer w0.152: U15.1 89.719,19.769 90.612,19.769 90.678,19.835 91.957,19.835 91.987,19.835 91.998,19.824 92.651,19.824 CN1.A6 94.146,19.75 94.463,20.066 94.463,20.421 94.134,20.75 CN1.B6
GND: C1.2 C2.1 C3.1 C4.2 C5.1 C6.1 C7.1 C8.1 C9.1 C10.1 C11.1 C12.1 C13.2 C14.2 C15.2 C16.2 C17.2 C18.2 C19.2 C20.2 C21.1 C24.2 C25.2 C26.1 C27.1 C28.2 C29.2 C30.2 C31.2 C33.1 C34.1 C35.2 C37.2 C38.1 C39.1 C40.2 C41.2 C42.2 CN1.A1/B12 CN1.B1/A12 CN1.S1 CN1.S2 CN1.S3 CN1.S4 J1.2 J2.2 P3.3 P3.5 P3.9 pad.2 Q1.2 Q2.2 R7.2 R14.2 R15.2 R16.2 R18.2 R20.1 R25.1 SW1.1 SW1.3 SW2.1 SW2.3 SW3.1 SW3.3 SW4.1 SW4.3 U1.18 U1.31 U1.47 U1.63 U2.3 U3.3 U4.3 U5.3 U6.3 U7.3 U8.3 U9.7 U10.2 U11.2 U12.2 U13.2 U14.1 U14.8 U14.10 U14.12 U14.13 U14.16 U14.17 U14.21 U14.22 U14.23 U14.24 U14.25 U14.29 U14.30 U15.3 U16.2 X1.2 X1.4 | length 120.2
  Top Layer w0.178: v1(67.246,23.139) 67.248,23.141 67.248,24.298 U1.63 ; U1.18 67.255,13.205 67.255,14.296 v1(67.259,14.3) ; U1.31 73.756,13.206 73.756,14.294 v1(73.762,14.3) ; v1(74.752,21.996) 74.754,21.998 76.048,21.998 U1.47 ; v1(88.621,20.752) v1(88.621,20.752) ; U15.3@89.699,20.751 U15.3
  Top Layer w0.381: v1(88.621,20.752) U15.3@89.699,20.751
  Top Layer w0.508: v1(21.158,11.252) 21.16,11.25 U13.2 ; v1(21.768,14.503) 22.822,14.503 C42.2 ; v1(24.105,4.496) 24.895,4.496 24.92,4.47 U16.2 ; C28.2 24.699,1.524 v1(25.832,1.524) ; v1(28.219,11.074) 28.219,10.396 28.179,10.356 27.794,10.356 28.225,9.925 C33.1 ; v1(30.48,11.074) 30.48,9.945 C34.1 ; v1(33.884,13.157) 34.982,13.157 C37.2 ; v1(34.036,15.773) 35.048,15.773 R18.2 ; v1(34.163,18.745) 35.32,18.745 C40.2 ; U9.7 38.891,9.881 v1(39.929,9.881) ; U11.2 U11.2 v1(39.751,16.205) ; v1(41.173,20.498) 42.198,20.498 R25.1 ; v1(41.199,14.249) C35.2 ; v1(48.539,23.266) 48.55,23.256 Q1.2 ; SW4.1 51.105,38.211 v1(51.105,39.522) ; SW4.3 51.105,46.191 v1(51.105,44.983) ; v1(51.613,21.844) 52.544,21.844 Q2.2 ; U8.3 51.714,33.514 v1(51.714,34.265) ; C16.2 55.719,31.369 v1(56.794,31.369) ; v1(57.633,15.824) C1.2 ; v1(57.683,13.725) 58.8,13.725 C11.1 ; v1(57.785,32.512) 57.971,32.698 57.971,33.421 U7.3 ; C2.1 59.258,21.933 v1(59.258,23.089) ; R20.1 60.02,6.47 v1(60.02,7.493) ; SW3.1@60.096,38.211 v1(60.096,39.522) ; v1(60.096,44.983) SW3.3@60.096,46.191 ; v1(60.63,35.204) 59.596,35.204 59.596,35.179 60.679,34.096 60.679,33.521 U6.3 ; X1.2@60.935,19.885 X1.2 ; v1(62.484,7.518) 62.502,7.5 U12.2 ; X1.4 62.613,22.163 62.613,23.938 C3.1 62.678,24.003 v1(63.856,24.003) ; v1(62.738,14.808) 62.738,15.688 R7.2 ; C17.2 64.694,31.344 v1(65.786,31.344) ; v1(64.694,10.973) 65.798,10.973 C6.1 ; v1(67.92,25.908) 67.92,26.995 C12.1 ; v1(68.301,30.124) U4.3@68.301,30.999 ; C41.2 68.779,6.604 v1(69.901,6.604) ; SW2.1@69.113,38.211 v1(69.113,39.522) ; v1(69.113,44.983) SW2.3@69.113,46.191 ; v1(69.596,35.204) 68.596,35.204 C14.2 68.575,35.2 69.679,34.096 69.679,33.521 U5.3 ; v1(69.698,10.998) 70.823,10.998 C4.2 ; v1(71.069,6.604) 72.221,6.604 C39.1 ; v1(72.517,31.293) 73.643,31.293 C18.2 ; v1(72.669,25.883) 72.669,26.994 C7.1 ; v1(74.549,25.857) 74.549,26.974 C10.1 ; U10.2 75.25,6.368 75.26,6.358 75.291,6.358 75.704,5.944 75.704,5.471 C38.1 76.175,5.015 76.646,5.486 v1(77.292,5.486) ; C5.1 76.677,10.998 v1(77.826,10.998) ; v1(77.292,31.826) 77.292,31.008 U2.3 ; C13.2 77.58,35.23 v1(78.664,35.23) ; SW1.1@78.08,38.236 v1(78.08,39.548) ; v1(78.08,45.009) SW1.3@78.08,46.217 ; C9.1 78.25,18.75 ; C8.1 78.25,18.75 ; v1(78.689,32.69) 78.689,33.489 U3.3 ; v1(79.197,18.745) 79.192,18.75 78.25,18.75 ; C19.2 82.657,31.293 v1(83.718,31.293) ; C25.2 88.468,17.957 v1(88.468,16.84) ; C24.2 88.445,23.52 v1(89.56,23.52) ; CN1.A1/B12 93.136,16.75 93.182,16.704 93.182,15.907 93.41,15.68 CN1.S2 ; CN1.B1/A12 93.136,23.25 93.182,23.296 93.182,24.093 93.41,24.32 CN1.S1
  Top Layer w0.762: C29.2 48.997,12.178 v1(48.997,13.386) v1(50.368,13.386) v1(51.74,13.386) ; C30.2 51.74,12.185 v1(51.74,13.386) ; C31.2 54.483,12.192 v1(54.483,13.386) v1(53.111,13.386) v1(51.74,13.386) ; v1(60.681,20.015) 60.835,20.015 X1.2
  Bottom Layer w0.508: v1(5.69,27.864) 5.69,29.471 U14.1 ; v1(10.592,27.864) 10.592,29.473 U14.8 ; v1(10.744,38.557) 10.744,37.431 C20.2 ; U14.10 12.014,29.457 v1(12.014,27.864) ; C21.1@12.751,37.426 v1(12.751,38.557) ; U14.12 13.437,29.434 v1(13.437,27.864) ; U14.13 14.097,29.474 v1(14.097,27.864) ; U14.16 16.205,29.466 v1(16.205,27.864) ; v1(16.891,27.864) 16.891,29.472 U14.17 ; v1(19.685,27.864) 19.685,29.466 U14.21 ; U14.22 20.396,29.475 v1(20.396,27.864) ; U14.23 21.107,29.464 v1(21.107,27.864) ; v1(21.742,36.525) 21.742,37.542 R14.2 ; v1(21.793,27.864) 21.793,29.474 U14.24 ; U14.25 22.504,29.467 v1(22.504,27.864) ; v1(23.724,38.557) 23.724,37.451 C27.1 ; U14.29 25.298,29.473 v1(25.298,27.864) ; C26.1 25.756,37.431 v1(25.756,38.557) ; U14.30 26.01,29.461 v1(26.01,27.864) ; v1(57.785,32.512) 57.81,32.487 v1@57.861,32.487 ; v1(97.307,18.72) 98.27,18.72 R15.2 ; v1(97.307,21.742) 98.292,21.742 R16.2
MIC_REG_EN: Q2.3 R24.1 U10.3 | length 30.9
  Top Layer w0.127: Q2.3 R24.1 53.65,18.05 54.187,17.513 54.187,16.883 56.337,14.732 56.337,13.183 59.796,9.724 69.951,9.724 70.587,9.088 70.587,8.255 71.349,7.493 75.593,7.493 75.827,7.259 76.2,6.886 U10.3
NetC1_1: C1.1 R4.2 U1.7 | length 39.3
  Top Layer w0.127: v1(57.607,17.704) 58.721,17.704 C1.1 ; v1(63.627,19.482) 63.636,19.491 64.941,19.491 U1.7 69.843,19.5 73.279,22.936 78.798,22.936 86.175,30.314 89.663,30.314 90.2,30.85 R4.2
  Bottom Layer w0.127: v1(57.607,17.704) 59.385,19.482 v1(63.627,19.482)
NetC4_1: C4.1 U1.30 | length 2.4
  Top Layer w0.127: C4.1 72.847,11.172 72.847,12.047 73.25,12.45 U1.30
NetC22_1: C22.1 U14.2 | length 8.6
  Bottom Layer w0.127: U14.2 6.395,33.483 5.809,34.069 5.809,36.51 6.725,37.425 C22.1
NetC22_2: C22.2 U14.3 | length 6.2
  Bottom Layer w0.127: C22.2 6.756,35.569 6.756,33.858 7.095,33.52 U14.3
NetC23_1: C23.1 U14.4 | length 6.5
  Bottom Layer w0.127: U14.4 7.795,33.424 8.75,34.379 C23.1
NetC23_2: C23.2 U14.5 | length 8.8
  Bottom Layer w0.127: U14.5 8.495,33.336 9.69,34.532 9.69,36.51 8.775,37.425 C23.2
NetC26_2: C26.2 U14.28 | length 6.6
  Bottom Layer w0.127: U14.28 24.595,33.383 25.756,34.544 25.756,35.53 25.73,35.555 C26.2
NetC27_2: C27.2 U14.27 | length 6.2
  Bottom Layer w0.127: C27.2 C27.2 23.749,34.315 23.895,34.169 U14.27
NetC32_1: C32.1 U9.1 | length 3.2
  Top Layer w0.127: C32.1 42.425,7.932 43.088,8.595 U9.1
NetC32_2: C32.2 L1.1 U9.8 | length 3
  Top Layer w0.127: U9.8 38.877,8.593 39.616,8.593 40.154,8.055 40.154,7.171 C32.2
NetC33_2: C33.2 C34.2 L1.2 R17.2 U16.3
NetC35_1: C35.1 U9.4 | length 1.9
  Top Layer w0.127: U9.4 44.125,14.2 C35.1
NetC36_1: C36.1 C37.1 U9.6 | length 4
  Top Layer w0.127: C37.1 C36.1 37.44,11.135 U9.6
NetC36_2: C36.2 R18.1 | length 2.7
  Top Layer w0.127: R18.1 37.25,15.725 C36.2
NetCN1_A5: CN1.A5 R15.1 | length 3.5
  Top Layer w0.127: CN1.A5 92.74,18.735 95.133,18.735 v1(95.148,18.72)
  Bottom Layer w0.127: v1(95.148,18.72) 96.17,18.72 R15.1
NetCN1_B5: CN1.B5 R16.1 | length 3.5
  Top Layer w0.127: CN1.B5 92.729,21.746 95.145,21.746 v1(95.148,21.742)
  Bottom Layer w0.127: v1(95.148,21.742) 96.192,21.742 R16.1
NetP1_2: P1.2 P3.1 | length 4
  Bottom Layer w0.127: P1.2 92.528,39 95.357,36.171 P3.1
NetP3_2: P3.2 R1.1 | length 4.9
  Top Layer w0.127: R1.1 93.931,36.25 94.567,36.886 95.92,36.886 P3.2
NetP3_4: P3.4 R2.1 | length 11
  Top Layer w0.127: R2.1 92.3,34.65 91.641,35.31 91.621,35.31 91.509,35.421 91.509,37.079 91.621,37.191 96.627,37.191 97.351,36.467 97.351,35.616 P3.4
NetP3_6: P3.6 R3.1 | length 12.2
  Top Layer w0.127: R3.1 92.3,32.6 91.64,31.941 91.621,31.941 91.509,31.829 91.509,30.171 91.621,30.06 96.615,30.06 97.351,30.795 97.351,32.915 P3.6
NetP3_10: P3.10 R4.1 | length 4.9
  Top Layer w0.127: R4.1 93.937,31 94.561,30.375 95.92,30.375 P3.10
NetQ1_1: Q1.1 Q2.1 R26.2 | length 6.7
  Top Layer w0.127: Q1.1 Q1.1@50.45,22.05 ; R26.2 Q1.1@50.45,22.05 ; Q2.1 54.013,22.287 54.013,22.491 53.746,22.758 51.74,22.758 51.468,22.487 50.887,22.487 Q1.1@50.45,22.05
NetR8_1: R8.1 SW1.2 SW1.4 U3.2 | length 14.8
  Top Layer w0.127: U3.2 79.65,33.625 80.243,34.218 80.713,34.218 81.094,34.6 81.094,34.91 81.41,35.225 R8.1 82.2,36.543 82.895,37.238 SW1.2 SW1.4
NetR9_1: R9.1 SW2.2 SW2.4 U5.2 | length 14.8
  Top Layer w0.127: U5.2 70.65,33.625 71.243,34.218 71.713,34.218 72.094,34.6 72.094,34.91 72.41,35.225 R9.1 73.2,36.543 73.895,37.238 SW2.2 SW2.4
NetR10_1: R10.1 SW3.2 SW3.4 U6.2 | length 14.8
  Top Layer w0.127: U6.2 61.65,33.625 62.243,34.218 62.713,34.218 63.094,34.6 63.094,34.91 63.41,35.225 R10.1 64.2,36.038 64.895,36.733 SW3.2 SW3.4
NetR11_1: R11.1 SW4.2 SW4.4 U8.2 | length 14.8
  Top Layer w0.127: U8.2 52.65,33.625 53.243,34.218 53.713,34.218 54.094,34.6 54.094,34.91 54.41,35.225 R11.1 55.2,36.038 55.895,36.733 SW4.2 SW4.4
NetR14_1: R14.1 U14.26 | length 6.6
  Bottom Layer w0.127: R14.1@21.768,35.432 R14.1 21.75,34.257 23.195,32.812 U14.26
NetR19_1: R19.1 U12.1 U12.4 | length 6.1
  Top Layer w0.127: R19.1 62.1,8.45 U12.1 64.05,8.45 64.727,8.45 65.227,7.95 65.227,6.934 65.611,6.55 U12.4
NetR21_1: R21.1 R22.1 U13.1 U13.4 | length 32.1
  Top Layer w0.127: U13.1 23.081,12.2 24.688,10.592 24.688,10.562 24.95,10.3 U13.4 26.606,10.3 27,9.906 27,9.27 27.279,8.992 31.318,8.992 31.648,9.322 31.648,10.338 32.131,10.82 33.147,10.82 33.731,11.405 33.731,12.04 33.934,12.243 35.941,12.243 36.093,12.395 36.093,13.947 36.398,14.252 v1(36.834,14.252) ; v1(40.183,14.275) 40.208,14.3 40.642,14.3 40.716,14.375 40.716,14.376 40.817,14.477 40.817,14.858 41.199,15.24 42.809,15.24 43.133,15.563 43.763,15.563 44.3,16.1 R21.1 44.3,16.4 43.763,16.937 43.762,16.937 43.35,17.348 43.206,17.348 42.74,17.814 42.736,17.814 42.2,18.35 R22.1
  Bottom Layer w0.127: v1(36.834,14.252) 36.846,14.263 40.171,14.263 v1(40.183,14.275)
NetU1_60: U1.60
NetU2_4: U2.4 U4.1 | length 11.9
  Top Layer w0.127: U4.1 67,31.684 67.551,32.234 76.381,32.234 77.135,32.988 77.139,32.988 77.3,33.15 U2.4
NetU4_2: U4.2 U7.4 | length 12.4
  Top Layer w0.127: U7.4 58.083,31.082 58.083,31.641 58.355,31.913 58.964,31.913 v1(59.055,32.004) ; v1(61.595,31.979) 62.962,31.979 63.199,32.215 65.738,32.215 66.584,31.369 66.584,30.425 66.725,30.284 67.295,30.284 67.489,30.478 67.489,30.838 U4.2
  Bottom Layer w0.127: v1(59.055,32.004) 59.08,31.979 v1(61.595,31.979)
PA0: U1.14 U16.1 | length 48.6
  Top Layer w0.127: U16.1 24.995,3.505 v1(40.767,3.505) ; U1.14 64.951,16.001 v1(66.23,16.002) v1(66.23,16.002)
  Bottom Layer w0.127: v1(40.767,3.505) 44.425,3.505 49.174,8.255 59.88,8.255 61.531,9.906 61.531,11.303 v1(66.23,16.002)
PA1: R22.2 R25.2 U1.15 | length 31
  Top Layer w0.127: R22.2 R22.2@44.3,18.65 ; R25.2 R22.2@44.3,18.65 ; U1.15 63.841,15.5 63.767,15.426 63.767,14.973 61.163,12.37 58.09,12.37 56.744,13.716 56.744,18.009 54.038,20.714 48.842,20.714 47.315,19.187 44.836,19.187 R22.2@44.3,18.65
PA2: J3.1 P2.1 R19.2 R20.2 U1.16 | length 35.4
  Top Layer w0.127: v1(59.969,9.296) 59.969,8.581 R20.2 60.15,8.55 61.062,7.638 61.062,7.241 61.854,6.45 R19.2 ; v1(59.995,10.16) 64.264,14.429 64.264,14.92 64.343,15 U1.16 64.964,14.986 74.524,14.986 75.276,14.234 79.964,14.234 P2.1 86.223,16.52 J3.1
  Bottom Layer w0.127: v1(59.969,9.296) 59.982,9.309 59.982,10.147 v1(59.995,10.16)
PA3: J3.3 P2.2 U1.17 | length 22
  Top Layer w0.127: U1.17 66.75,14.401 67.081,14.732 74.371,14.732 75.123,13.98 P2.2 85.942,13.98 86.593,14.63 J3.3
PA4: U1.20
PA5: U1.21
PA6: U1.22
PA7: U1.23
PA8: U1.41
PA9: U1.42
PA10: U1.43
PA11: U1.44
PA12: U1.45
PA13: R1.2 U1.46 | length 25.5
  Top Layer w0.127: v1(74.041,22.352) 74.041,21.844 74.385,21.5 U1.46 ; v1(75.235,24.028) 78.813,24.028 88.9,34.116 88.9,35.052 89.412,35.564 89.663,35.564 90.2,36.1 R1.2
  Bottom Layer w0.127: v1(74.041,22.352) 74.041,22.835 v1(75.235,24.028)
PA14: R2.2 U1.49 | length 21
  Top Layer w0.127: U1.49 74.25,24.114 74.33,24.034 74.516,24.034 75.106,23.444 78.588,23.444 89.484,34.34 90.04,34.34 R2.2
PA15: U1.50
PB0: U1.26
PB1: U1.27
PB2: U1.28
PB3: R3.2 U1.55 U6.4 U7.1 | length 41.9
  Top Layer w0.127: U7.1 59.3,33.15 59.462,32.988 59.468,32.988 60.7,31.756 U6.4 60.7,30.825 60.912,30.613 60.917,30.613 63.311,28.219 68.893,28.219 69.137,27.975 69.137,26.138 69.596,25.679 70.612,25.679 71.25,25.041 U1.55 71.25,23.55 71.61,23.19 78.693,23.19 87.566,32.064 89.663,32.064 90.2,32.6 R3.2
PB4: U1.56 U7.2 U8.4 | length 26.8
  Top Layer w0.127: U8.4 51.7,30.825 51.912,30.613 51.917,30.613 52.171,30.359 57.207,30.359 57.429,30.582 57.429,31.521 58.65,32.742 ; U7.2@58.812,33.611 U7.2 58.65,32.742 ; U1.56@70.757,25.09 70.421,25.425 69.444,25.425 68.859,26.01 68.859,27.889 68.783,27.965 63.206,27.965 60.971,30.201 60.452,30.201 60.223,30.429 60.223,31.584 59.065,32.742 58.65,32.742
PB5: U1.57 U14.14 | length 60.8
  Top Layer w0.127: v1(14.834,27.902) 14.834,27.483 14.91,27.407 19.101,27.407 21.488,25.019 63.894,25.019 66.726,22.187 69.253,22.187 70.25,23.184 U1.57
  Bottom Layer w0.127: v1(14.834,27.902) 14.834,29.056 U14.14@14.91,29.133
PB6: R13.1 U1.58 U11.3 U14.18 | length 75.9
  Top Layer w0.127: v1(17.983,26.772) 19.308,26.772 22.864,23.216 27.232,23.216 32.385,18.063 33.252,17.196 37.821,17.196 37.871,17.145 37.875,17.145 38.07,16.95 U11.3 39.103,16.953 v1(39.103,24.587) ; v1(39.091,25.451) 63.83,25.451 66.84,22.441 68.999,22.441 69.75,23.192 U1.58
  Bottom Layer w0.127: R13.1 17.75,34.438 17.602,34.29 17.602,29.483 U14.18 17.595,27.16 v1(17.983,26.772) ; v1(39.091,25.451) 39.097,25.444 39.097,24.594 v1(39.103,24.587)
PB7: R12.1 U1.59 U11.4 U14.19 U14.20 | length 83.3